# EAGLE board 5v power supply (EAGLE 9.6.2)
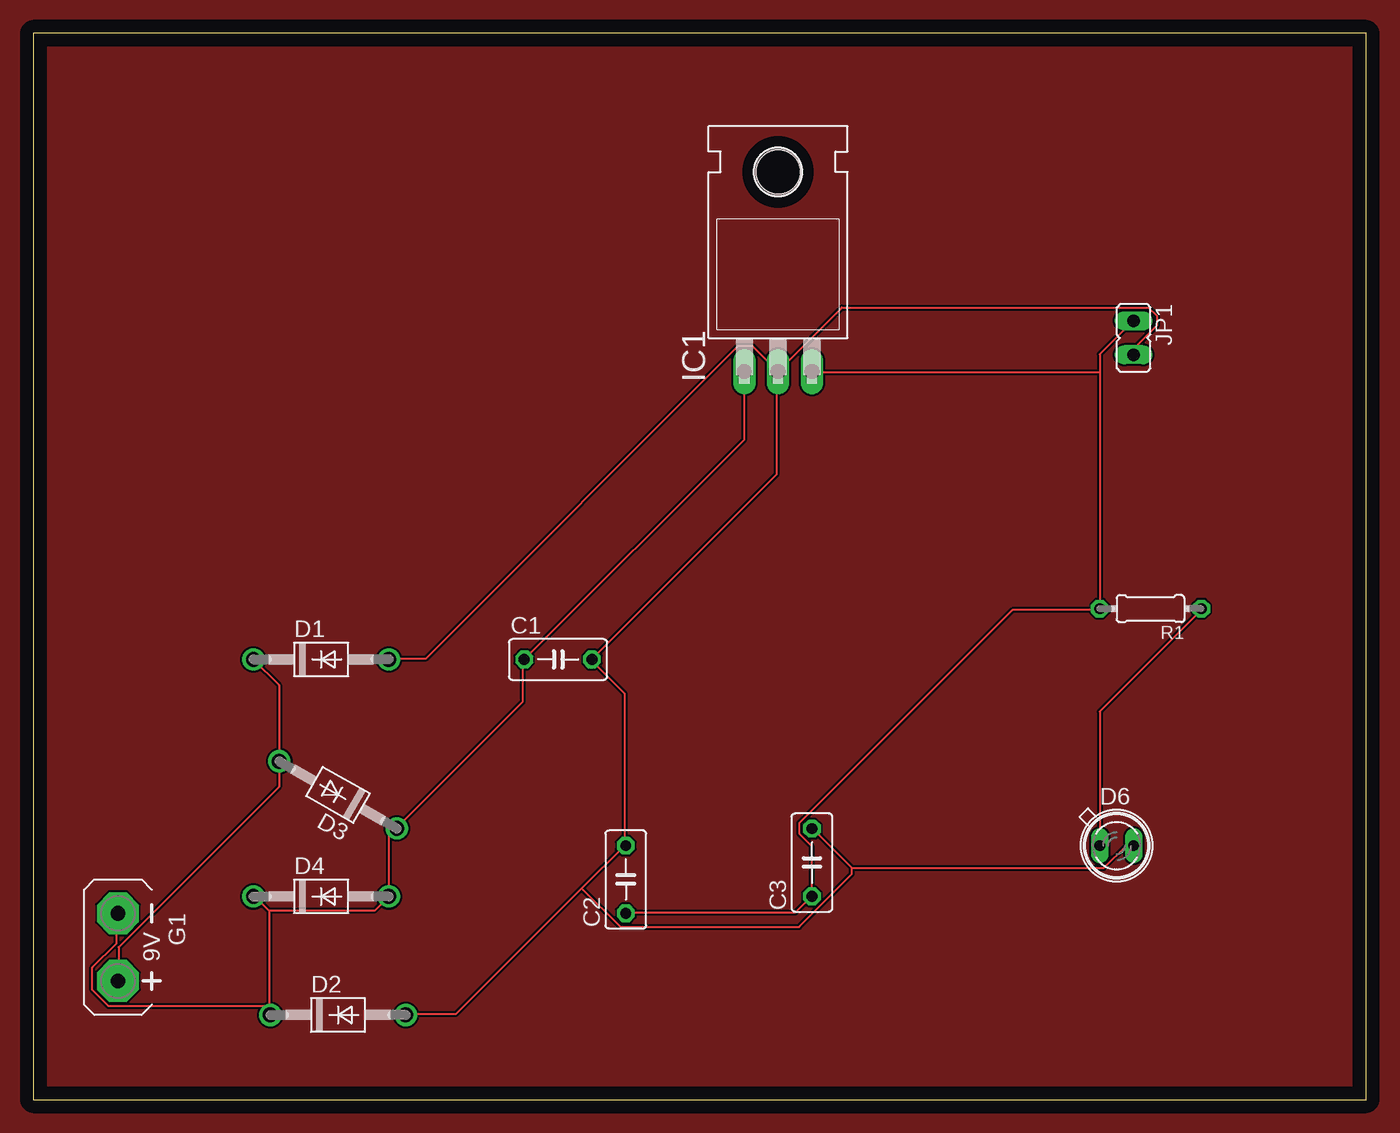
[diagram p0: board, top side]
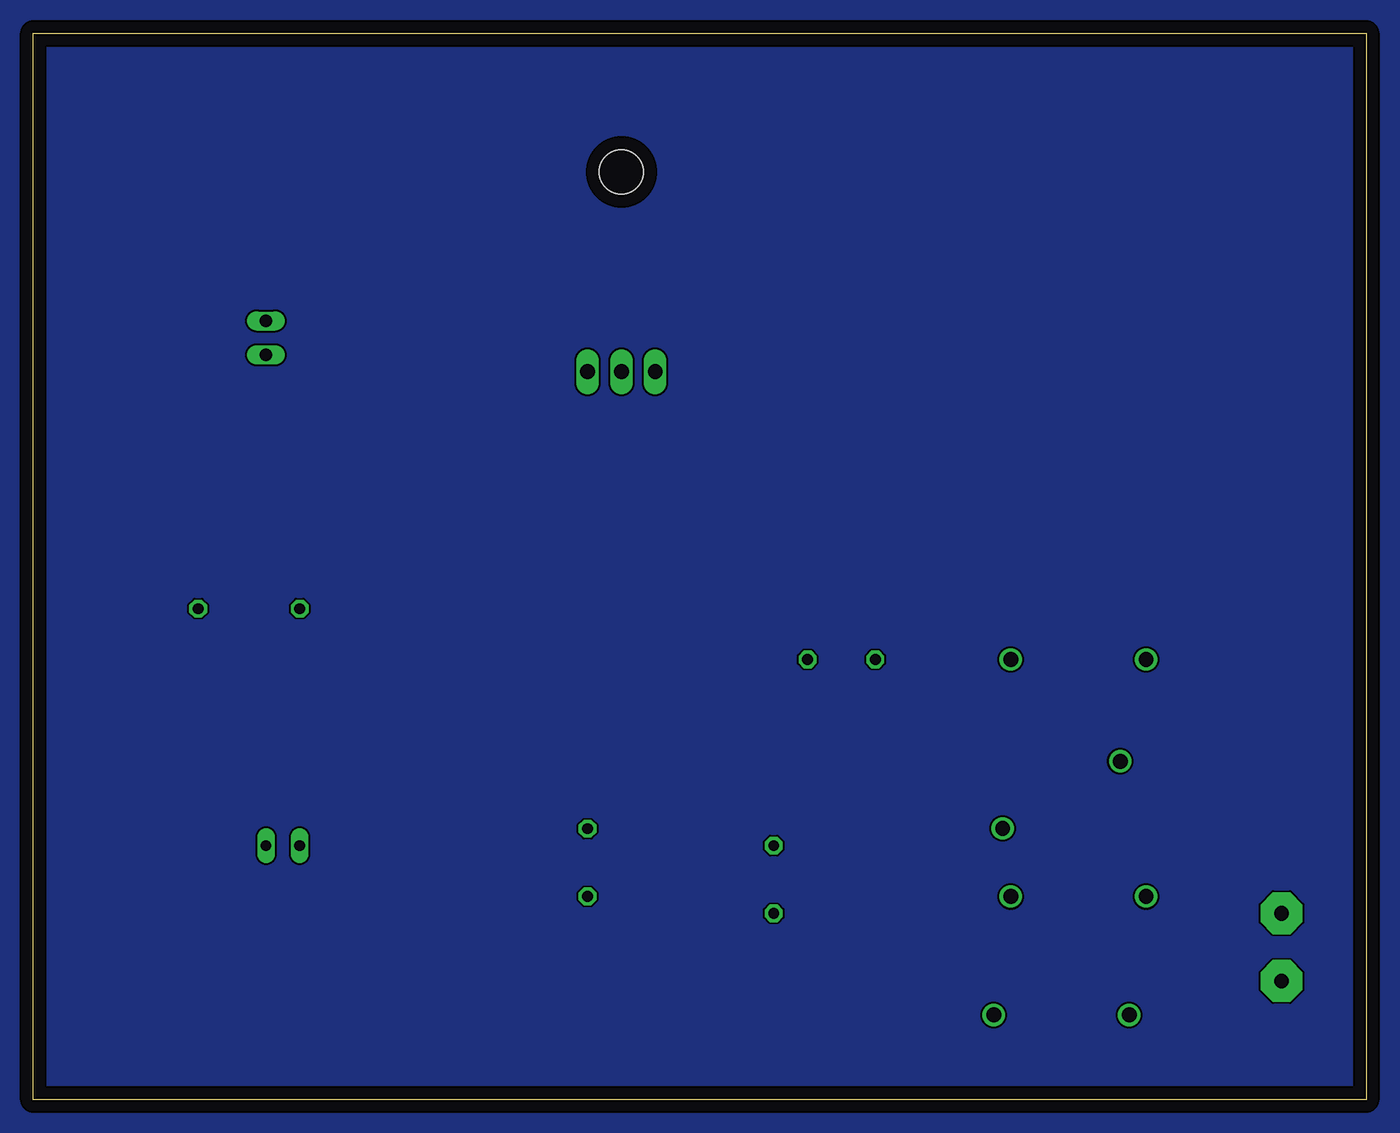
[diagram p1: board, bottom side, seen from below]

Size 100 x 80 mm. Coordinates in mm from the lower left corner, seen from the top.
Outline: 0,0 100,0 100,80 0,80 0,0
Copper layers (1*16): Top 0.035mm / dielectric 1.5mm / Bottom 0.035mm
Design rules "default": minimum track width 6mil, minimum drill 0.35mm, track to track 6mil, track to pad 6mil, pad to pad 6mil, via to via 6mil, smd to smd 6mil, copper to edge 40mil, drill to drill 6mil, minimum pad ring 10mil, minimum via ring 8mil, stop-mask expansion 4mil, vias tented up to drill 0mil, thermal gap 10mil

## Footprints (pad centres in the part's own frame; a part is rotated, then mirrored left to right if it is on the bottom)
C050-030X075 = drill 0.813 octagon: 1 -2.54,0; 2 2.54,0
DO41-10 = drill 1.118: A 5.08,0; C -5.08,0
SFH482 = drill 0.813 long: A -1.27,0; K 1.27,0
AB9V = drill 1.118 pad 3.15 octagon: + 0,2.54; - 0,-2.54
TO220H = drill 1.118 long: 1 -2.54,-10.16; 2 0,-10.16; 3 2.54,-10.16 | hole 3.302: 0,4.826
JP1 = drill 0.914 long: 1 0,-1.27; 2 0,1.27
0204/7 = drill 0.813 octagon: 1 -3.81,0; 2 3.81,0

## Placement (x,y rotation side)
C1  220uf  [C050-030X075]  39.37,33.02 0 top
C2  0.1uf  [C050-030X075]  44.45,16.51 90 top
C3  0.1uf  [C050-030X075]  58.42,17.78 90 top
D1  1N4004  [DO41-10]  21.59,33.02 0 top
D2  1N4004  [DO41-10]  22.86,6.35 0 top
D3  1N4004  [DO41-10]  22.86,22.86 150.3 top
D4  1N4004  [DO41-10]  21.59,15.24 0 top
D6  SFH482  [SFH482]  81.28,19.05 0 top
G1  AB9V  [AB9V]  6.35,11.43 180 top
IC1  7805T  [TO220H]  55.88,64.77 0 top
JP1  [JP1]  82.55,57.15 180 top
R1  420E  [0204/7]  83.82,36.83 180 top

## Library data of the parts
C1-C3 = rcl; SPICEPREFIX: C
D1-D4 = diode
D6 = led
G1 = battery
IC1 = linear
JP1 = jumper
R1 = rcl; SPICEPREFIX: R

## Nets
N$1: D6.A R1.1
N$2: C2.1 C3.1 IC1.3 JP1.1 R1.2
N$4: D1.C D3.A G1.+
N$5: C1.2 C2.2 C3.2 D1.A D2.A D6.K IC1.2 JP1.2
N$6: C1.1 D2.C D3.C D4.A D4.C G1.- IC1.1

## Tracks (layer width: path | path; a pad name or v marks a point on that pad's centre or on a via)
GND
  pour Top: -12.7,86.36 -12.7,-12.7 -11.43,-13.97 114.3,-13.97 114.3,90.17 -8.89,90.17
  pour Bottom: -19.05,91.44 -19.05,-16.51 -17.78,-17.78 -16.51,-19.05 124.46,-19.05 124.46,106.68 -3.81,106.68
N$1
  Top 0.152: D6.A 80.01,29.11 87.63,36.73 R1.1
N$2
  Top 0.152: 58.37,15.24 57.15,14.02 44.5,14.02 C2.1 | 80.01,54.56 80.01,55.93 82.45,58.37 JP1.1 | 80.01,54.56 R1.2 80.01,36.73 73.46,36.73 57.46,20.73 57.46,19.96 58.37,19.05 58.37,15.24 | 80.01,54.56 58.52,54.56 IC1.3 | 58.37,15.24 C3.1
N$4
  Top 0.152: D1.C 18.44,31.09 18.44,25.45 D3.A 18.44,25.3 18.44,23.47 6.4,11.43 6.4,8.99 G1.+
N$5
  Top 0.152: JP1.2 82.6,55.93 82.6,56.39 84.28,58.06 84.28,58.83 83.67,59.44 60.66,59.44 55.93,54.71 IC1.2 | IC1.2 53.95,56.54 52.88,56.54 29.41,33.07 26.67,33.07 D1.A | D6.K 81.99,19.05 80.31,17.37 61.42,17.37 | 61.42,17.37 58.52,20.27 C3.2 | 44.35,19.05 44.35,30.48 41.91,32.92 C1.2 41.91,33.07 55.78,46.94 55.78,54.56 IC1.2 | 44.35,19.05 41.15,15.85 | 41.15,15.85 31.7,6.4 28.04,6.4 D2.A | 44.35,19.05 C2.2 | 61.42,17.37 61.42,16.92 57.46,12.95 44.04,12.95 41.15,15.85
N$6
  Top 0.152: 17.68,14.17 17.68,7.01 | 17.68,7.01 17.68,6.4 D2.C 17.68,7.01 | 17.68,14.17 16.61,15.24 D4.C | 17.68,7.01 5.64,7.01 4.42,8.23 4.42,9.91 6.25,11.73 6.25,13.87 G1.- | IC1.1 53.34,49.53 C1.1 36.73,32.92 36.73,29.87 27.28,20.42 D3.C 27.13,20.27 26.67,19.81 D4.A 25.6,14.17 17.68,14.17